# EAGLE board fadhli (EAGLE 9.6.0)
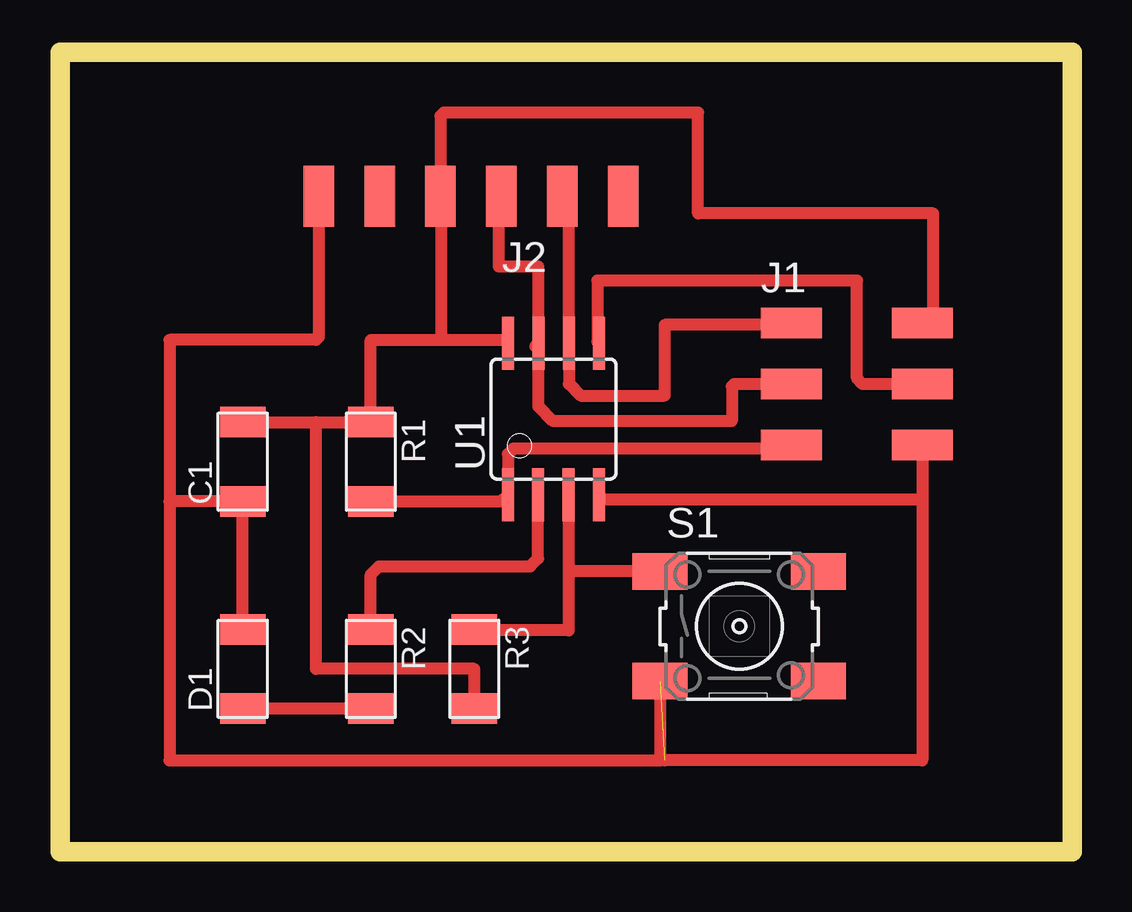
[diagram p0: board, top side]

Size 42.18 x 32.99 mm. Coordinates in mm from the lower left corner, seen from the top.
Outline: 0,0 42.18,0 42.18,32.99 0,32.99 0,0
Copper layers (1*16): Top 0.035mm / dielectric 1.5mm / Bottom 0.035mm
Design rules "default *": minimum track width 16mil, minimum drill 0.35mm, track to track 16mil, track to pad 16mil, pad to pad 16mil, via to via 12mil, smd to smd 6mil, copper to edge 40mil, drill to drill 6mil, minimum pad ring 10mil, minimum via ring 8mil, stop-mask expansion 4mil, vias tented up to drill 0mil, thermal gap 10mil
Milling: 4 lines

## Footprints (pad centres in the part's own frame; a part is rotated, then mirrored left to right if it is on the bottom)
C1206FAB = smd 1.27 x 1.905: 1 -1.651,0; 2 1.651,0
LED1206FAB = smd 1.27 x 1.905: 1 -1.651,0; 2 1.651,0
2X03SMD = smd 2.54 x 1.27: 1 -2.54,2.54; 2 2.92,2.54; 3 -2.54,0; 4 2.92,0; 5 -2.54,-2.54; 6 2.92,-2.54
1X06SMD = smd 2.54 x 1.27: 1 0,6.35; 2 0,3.81; 3 0,1.27; 4 0,-1.27; 5 0,-3.81; 6 0,-6.35
R1206FAB = smd 1.27 x 1.905: 1 -1.651,0; 2 1.651,0
6MM_SWITCH = smd 2.286 x 1.524: 1 -3.302,2.286; 2 3.302,2.286; 3 -3.302,-2.286; 4 3.302,-2.286
SOIC8 = smd 0.5 x 2.2: 1 -1.905,-3.154; 2 -0.645,-3.154; 3 0.625,-3.154; 4 1.895,-3.154; 5 1.905,3.154; 6 0.635,3.154; 7 -0.635,3.154; 8 -1.905,3.154

## Placement (x,y rotation side)
C1  1u  [C1206FAB]  7.62,16.26 90 top
D1  RED  [LED1206FAB]  7.62,7.62 90 top
J1  CONN_03X2_AVRISPSMD  [2X03SMD]  33.02,19.49 0 top
J2  FTDI  [1X06SMD]  17.13,27.32 90 top
R1  10K  [R1206FAB]  12.95,16.26 270 top
R2  499  [R1206FAB]  12.95,7.62 270 top
R3  10K  [R1206FAB]  17.27,7.62 270 top
S1  switch  [6MM_SWITCH]  28.32,9.4 0 top
U1  UC_ATTINY45SI  [SOIC8]  20.57,18.03 0 top

## Library data of the parts
C1 D1 J1 J2 R1-R3 S1 U1 = eagle_fab

## Nets
GND: C1.1 D1.2 J1.6 J2.1 S1.3 U1.4
LED: R2.1 U1.2
MISO: J1.1 J2.5 U1.6
MOSI: J1.4 U1.5
N$1: D1.1 R2.2
PB: R3.1 S1.1 U1.3
RESET: J1.5 R1.2 U1.1
SCK: J1.3 J2.4 U1.7
VCC: C1.2 J1.2 J2.3 R1.1 R3.2 U1.8

## Tracks (layer width: path | path; a pad name or v marks a point on that pad's centre or on a via)
GND  (1 unrouted)
  Top 0.508: J2.1 10.78,21.45 10.67,21.34 4.57,21.34 4.57,14.61 | 4.57,14.61 4.57,3.81 25.02,3.81 S1.3 | 25.2,3.81 35.94,3.81 35.94,14.7 | D1.2 C1.1 4.57,14.61 | J1.6 35.94,14.7 | U1.4 22.65,14.7 35.94,14.7
LED
  Top 0.508: R2.1 12.95,11.55 13.3,11.9 19.6,11.9 19.93,12.23 U1.2
MISO
  Top 0.508: 20.57,26.95 J2.5 21.21,27.06 U1.6 21.21,19.5 21.7,19.01 25.2,19.01 25.2,21.95 30.4,21.95 J1.1
MOSI
  Top 0.508: J1.4 33.46,19.49 33.22,19.73 33.22,23.8 22.4,23.8 22.4,21.27 U1.5
N$1
  Top 0.508: R2.2 D1.1
PB
  Top 0.508: 24.53,11.2 S1.1 21.41,11.68 21.2,11.9 | R3.1 17.32,9.23 21.2,9.23 21.2,11.9 | U1.3 21.2,11.9
RESET
  Top 0.508: R1.2 18.39,14.61 U1.1 18.67,16.57 18.9,16.8 30.33,16.8 J1.5
SCK
  Top 0.508: 18.41,27.31 J2.4 18.29,27.21 18.29,24.38 19.94,24.38 U1.7 | 19.81,21.06 U1.7 | J1.3 28.11,19.49 28,19.38 28,17.95 20.55,17.95 19.94,18.56 U1.7
VCC
  Top 0.508: C1.2 10.67,17.91 | 10.67,17.91 R1.1 12.95,21.34 15.88,21.34 | R3.2 17.27,7.62 10.67,7.62 10.67,17.91 | 15.88,21.34 18.52,21.34 U1.8 | J2.3 16,27.18 16,28 | J1.2 36.4,22.49 36.4,26.6 26.6,26.6 26.6,30.8 16,30.8 15.86,30.66 J2.3 | J2.3 15.88,27.31 15.88,21.34